# Altium PCB 11温度传感器OK.PcbDoc
Units mil, origin at the board's own origin, x right, y up, seen from the top; angles counter-clockwise.
Board outline 1673 x 1443 mil, 2 copper layers (Top Layer, Bottom Layer); 1 components, 5 nets, 8 pads, 18 vias.
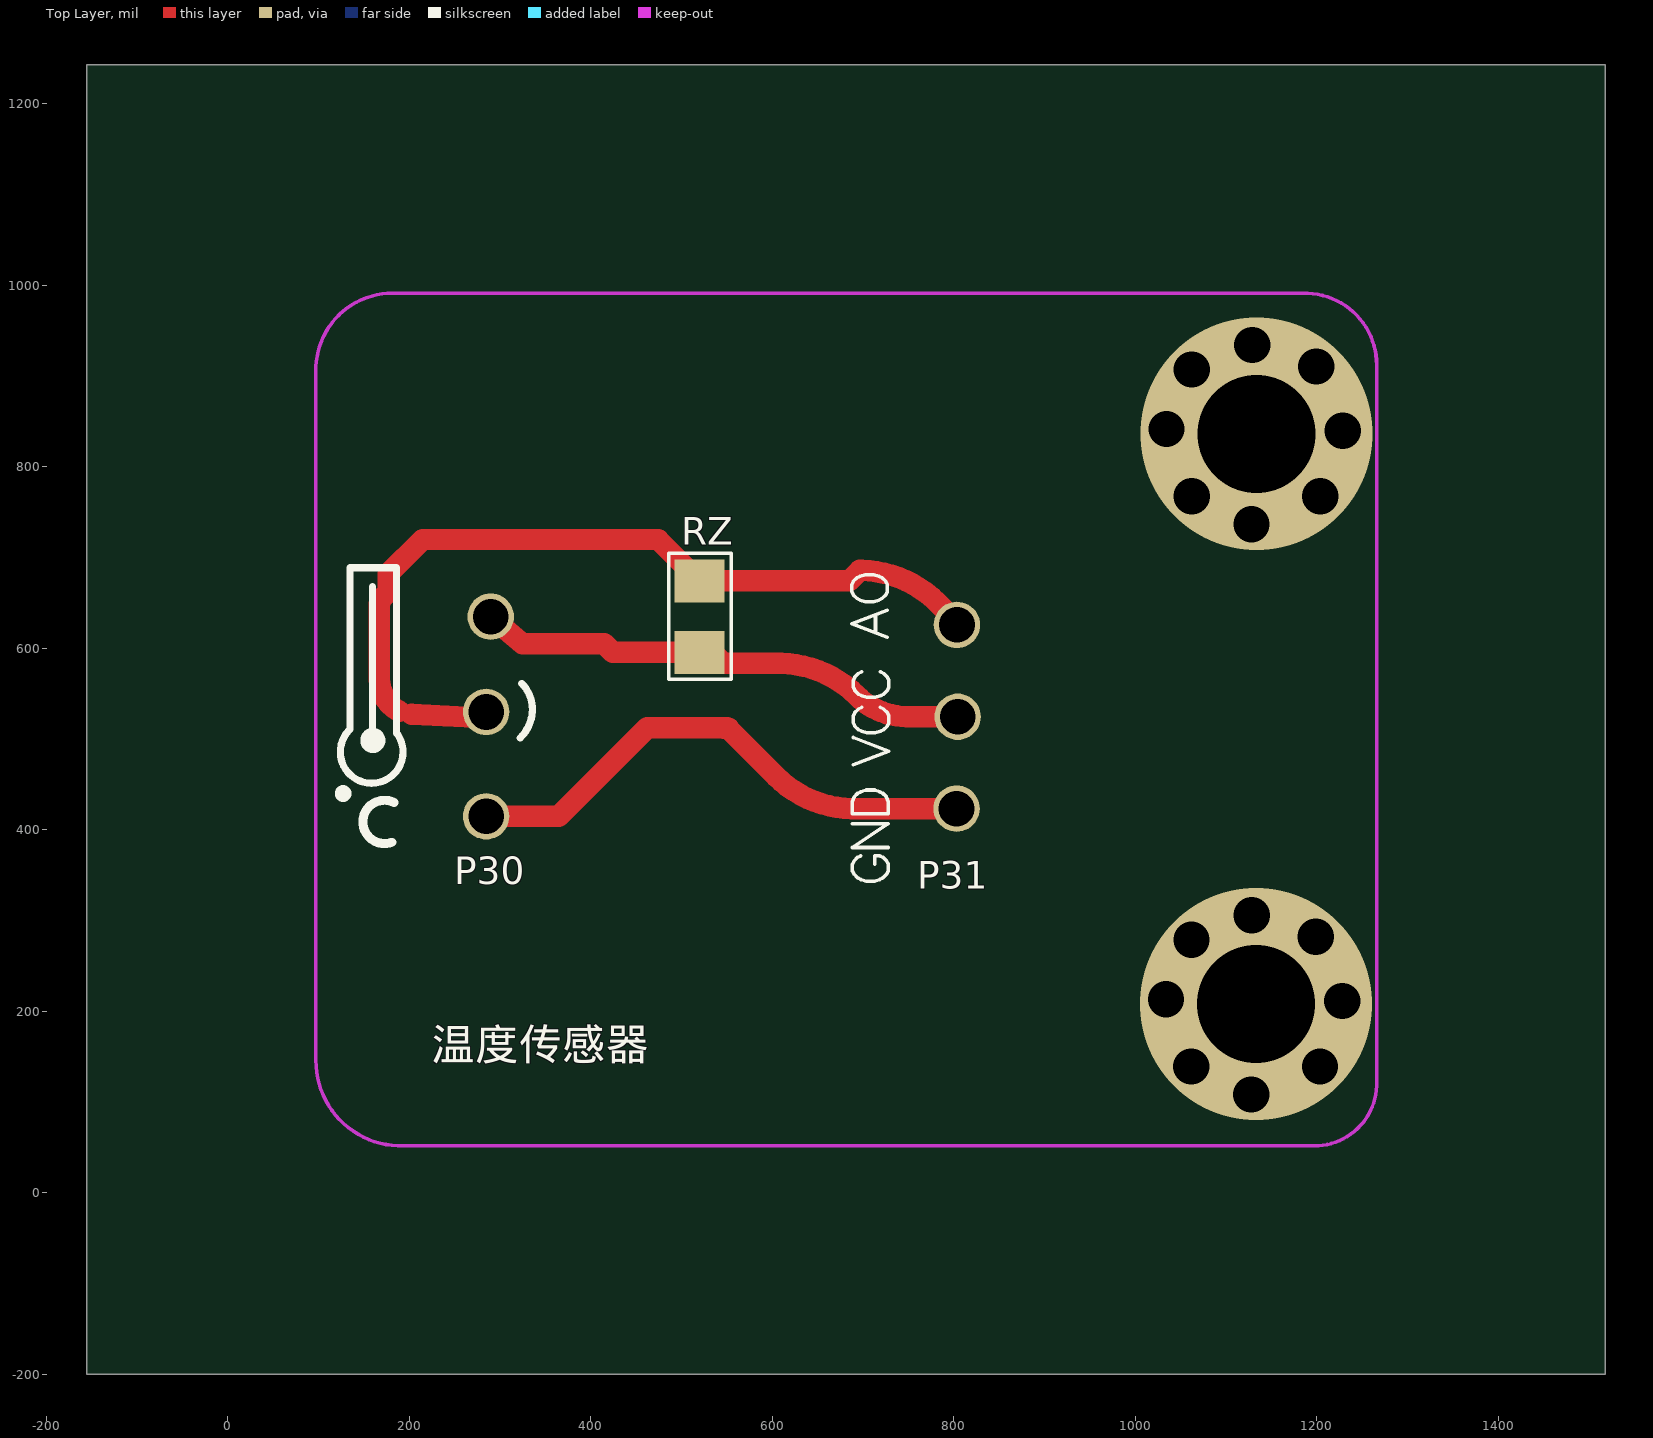
[diagram p0: Top Layer view]
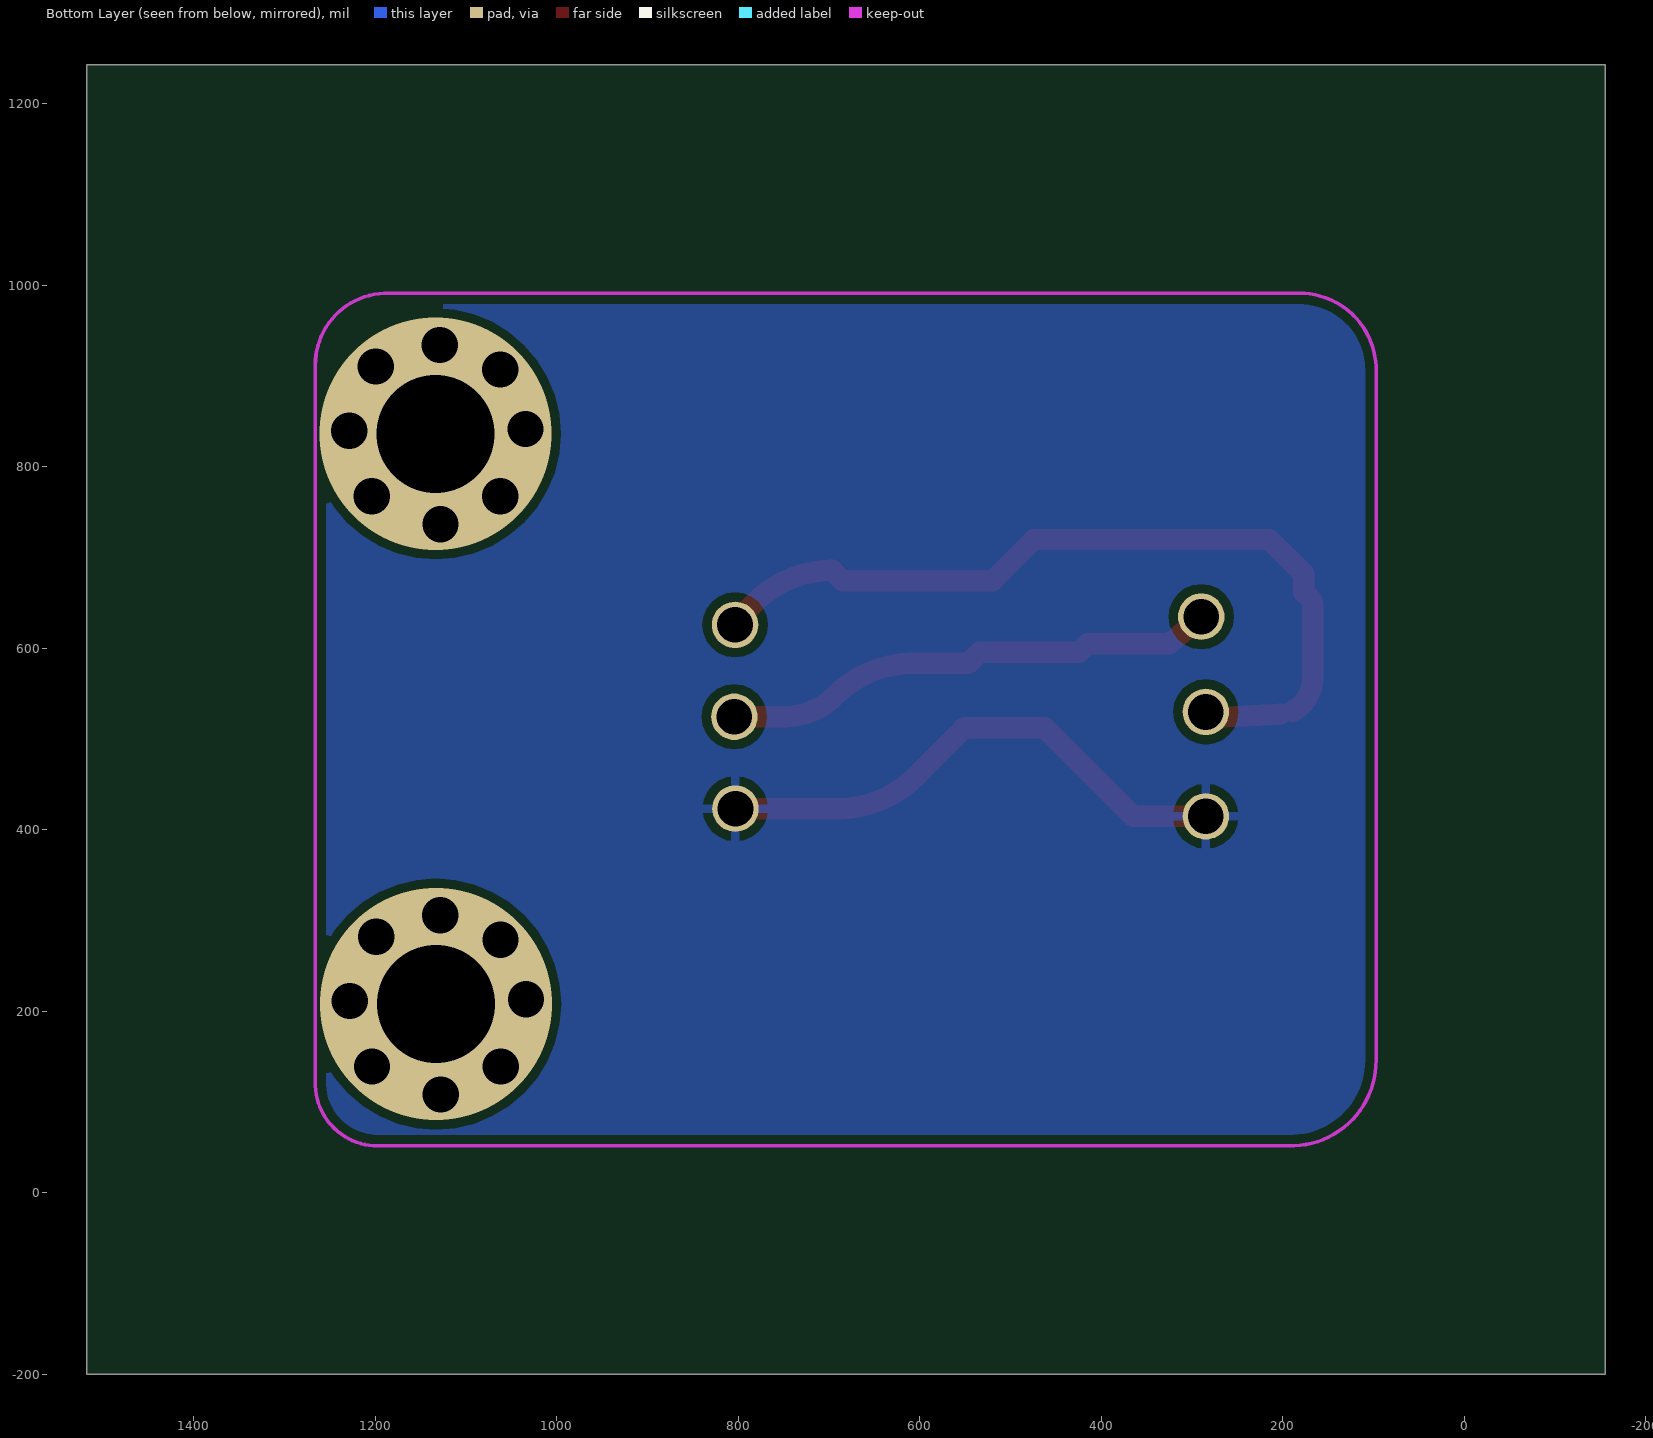
[diagram p1: Bottom Layer view, seen from below]

## Layer stack, top to bottom
Top Solder: solder mask 0.4, Solder Resist, Dk 3.5
Top Layer: signal copper 1.4
Dielectric1: dielectric 12.6, FR-4, Dk 4.8
Bottom Layer: signal copper 1.4
Bottom Solder: solder mask 0.4, Solder Resist, Dk 3.5

## Board outline
-155,-200 1518,-200 1518,1243 -155,1243

## Design rules (kind name [scope] priority, off if disabled: settings)
Clearance CAM_Clearance_2 [OnLayer('Top Layer')] p1: gap=10 ignorepadtopadclearanceinfootprint=FALSE except(0: Arc-Hole Track-Hole SMDPad-Hole THPad-Hole Via-Hole Fill-Hole Poly-Hole Region-Hole Text-Hole)
Clearance CAM_Clearance_1 [OnLayer('Bottom Layer')] p2: gap=10 ignorepadtopadclearanceinfootprint=FALSE except(0: Arc-Hole Track-Hole SMDPad-Hole THPad-Hole Via-Hole Fill-Hole Poly-Hole Region-Hole Text-Hole)
Clearance [All] p3: gap=10 ignorepadtopadclearanceinfootprint=FALSE except(0: Arc-Hole Track-Hole SMDPad-Hole THPad-Hole Via-Hole Fill-Hole Poly-Hole Region-Hole Text-Hole)
PolygonConnect [All] p1: connectstyle=Relief reliefconductorwidth=10 reliefentries=4 polygonreliefangle="90 Angle" airgapwidth=10
RoutingVias [All] p1: holewidth=28 width=50 viastyle="Through Hole" minholewidth=28 minwidth=50 maxholewidth=28 maxwidth=50
SilkToSolderMaskClearance SilkscreenOverComponentPads [IsPad] p1: minsilkscreentomaskgap=10 clearancetoexposedcopper=TRUE
SolderMaskExpansion [All] p1: expansion=4
Width CAM_Width_2 [OnLayer('Top Layer')] p1: maxlimit=24.62 minlimit=22.62 preferedwidth=23.62
Width CAM_Width_1 [OnLayer('Bottom Layer')] p2: maxlimit=11 minlimit=4 preferedwidth=5
Width [All] p3: maxlimit=10 minlimit=10 preferedwidth=10
29 further rules are at their usual default settings.

## Components (designator, comment, footprint, x,y, rotation, side; value= is the part's Value field where it differs from the comment)
RZ "10K 5%" 0805-R 520,635 r270 top

## Footprints (in the part's own frame and the unit in brackets; to place one, negate y for a bottom-side part, rotate by r counter-clockwise, add the part's x,y. Pads: shape width x height; smd on the part's side, far side on the other; paste and mask are expansions set on the pad)
0805-R [mm]
  rect 1.2x1.4 smd: 1(-1,0) 2(1,0)
  silkscreen extent -1.78,-0.86 1.75,0.89, body extent -0.97,-0.61 1.03,0.64, height 0.55

## Free pads (board coordinates)
  round 51.18 hole 39.37: 15(285,415) 15(285,530) 15(290,635) 15(803.36,423.44) 15(803.78,625.94) 15(804.61,524.69)

## Via types
v1: diameter 40, hole 40, Top Layer to Bottom Layer, 16 vias
v2: diameter 255.91, hole 129.92, Top Layer to Bottom Layer, 2 vias

## Nets (pads, with @x,y where several pads share a name; then routed paths per layer and width w, separated by ;. In a path a pad name is that pad's centre, name@x,y a point inside that pad or via, vN(x,y) a via of type N, cw(c..) or ccw(c..) an arc to the next point about the centre after c; other vN are vias at no path point)
$Net0: pad.15@285,415 pad.15@803.36,423.44 | length 596.3
  Top Layer w23.62: pad.15@285,415 365,415 462.6,512.6 550.86,512.6 604.67,458.79 610.83,453.04 617.38,447.74 624.28,442.91 631.5,438.57 639.01,434.75 646.76,431.45 654.73,428.71 662.87,426.53 671.14,424.92 679.5,423.9 687.91,423.46 690.03,423.44 pad.15@803.36,423.44 ; 546.69,512.19 552.52,512.19
$Net1: pad.15@285,530 pad.15@803.78,625.94 RZ.1 | length 934.1
  Top Layer w23.62: 189.32,530.8 187.2,531.88 185.16,533.11 183.2,534.48 181.35,535.97 179.61,537.6 179.09,538.13 177.1,540.35 175.26,542.69 173.6,545.16 172.11,547.74 170.8,550.42 169.68,553.18 168.76,556.02 168.04,558.91 167.53,561.84 167.21,564.8 167.11,567.78 167.11,647.49 167.12,647.69 167.16,648.48 167.26,649.26 167.41,650.04 167.61,650.81 167.87,651.55 168.18,652.28 168.54,652.99 168.95,653.67 169.4,654.32 169.9,654.93 170.44,655.51 171.73,656.78 177.12,661.64 177.12,682.12 215,720 474.37,720 RZ.1 685.12,674.37 696.69,685.94 698.81,685.91 707.22,685.47 715.58,684.45 723.85,682.84 731.99,680.66 739.96,677.92 747.71,674.62 755.22,670.8 762.44,666.46 769.34,661.63 775.89,656.33 782.05,650.58 802.97,629.66 803.05,629.58 803.38,629.22 803.69,628.83 803.96,628.42 804.21,628 804.42,627.55 804.61,627.1 804.76,626.63 804.86,626.21 804.88,626.15 804.96,625.67 805.01,625.18 pad.15@805.03,624.69 ; 203.15,527.61 pad.15@284.65,523.34
$Net2: pad.15@290,635 pad.15@804.61,524.69 RZ.2 | length 552.3
  Top Layer w23.62: pad.15@290,635 325,605 415,605 424.37,595.63 RZ.2 534.29,595.63 RZ.2@546.26,583.66 ; RZ.2@546.28,583.43 607.95,583.43 610.06,583.41 618.47,582.97 626.83,581.95 635.1,580.34 643.24,578.16 651.21,575.42 658.96,572.12 666.47,568.3 673.69,563.96 680.59,559.13 687.14,553.83 693.3,548.08 697.38,544.28 701.71,540.77 706.27,537.58 711.05,534.7 716.02,532.17 721.15,530 726.42,528.18 731.8,526.74 737.27,525.68 742.8,525 748.37,524.71 749.76,524.69 804.61,524.69 pad.15@806.64,524.69
$Net3: 
  other v1: 1127.97,108.48 1062.12,139.3 1203.79,139.3 1228.38,211.4 1034.22,213.48 1062.13,278.9 1199.22,282.23 1128.79,305.99
  other v2: 1133.38,208.06
$Net4: 
  other v1: 1128.35,736.86 1062.5,767.69 1204.17,767.69 1228.76,839.78 1034.6,841.87 1062.51,907.28 1199.59,910.62 1129.17,934.37
  other v2: 1133.75,836.44

## Polygon pours and split planes (outlines as drawn)
$Net0 on Bottom Layer "Top Layer-No Net 4" (solid, remove dead copper, pour order 1000): 10,1025 10,85 95,0 100,-5 1100,-5 1245,-5 1330,80 1345,95 1345,480 1345,975 1295,1025

## Keep-outs
Keep-Out Layer:
  lines w3.94: 97.34,145.64 97.34,907.06 ; 97.34,145.96 97.55,139.41 98.21,132.9 99.33,126.45 100.89,120.09 102.89,113.85 105.33,107.77 108.18,101.88 111.43,96.2 115.08,90.75 119.09,85.58 123.46,80.7 128.15,76.14 133.15,71.91 138.44,68.04 143.98,64.55 149.75,61.46 155.73,58.78 161.87,56.52 168.16,54.69 174.56,53.31 181.04,52.38 187.58,51.9 190.84,51.83 ; 97.34,907.34 97.4,910.28 97.83,916.15 98.67,921.98 99.91,927.74 101.55,933.39 103.59,938.91 106,944.28 108.78,949.47 111.92,954.45 115.39,959.21 119.19,963.7 123.29,967.92 127.68,971.85 132.33,975.46 137.22,978.73 142.33,981.66 147.63,984.22 153.1,986.41 158.7,988.21 164.42,989.62 170.22,990.62 176.08,991.21 181.96,991.4 ; 181.68,991.37 1187.54,991.37 ; 191.16,51.83 1197.7,51.83 ; 1187.8,991.29 1190.55,991.23 1196.03,990.83 1201.47,990.05 1206.85,988.89 1212.13,987.35 1217.29,985.46 1222.3,983.21 1227.15,980.61 1231.8,977.68 1236.23,974.43 1240.43,970.89 1244.38,967.05 1248.04,962.96 1251.41,958.61 1254.47,954.05 1257.2,949.28 1259.6,944.33 1261.64,939.22 1263.32,933.99 1264.63,928.65 1265.57,923.23 1266.13,917.76 1266.3,912.27 ; 1197.47,51.82 1202.26,51.97 1207.02,52.46 1211.74,53.27 1216.38,54.41 1220.94,55.88 1225.39,57.66 1229.7,59.74 1233.85,62.12 1237.83,64.78 1241.61,67.72 1245.18,70.91 1248.52,74.34 1251.61,78 1254.43,81.86 1256.99,85.92 1259.25,90.14 1261.21,94.5 1262.86,99 1264.2,103.59 1265.21,108.27 1265.89,113.01 1266.24,117.79 1266.3,120.19 ; 1266.3,120.42 1266.3,912.54

## Silkscreen, mask and mechanical layers (free items; w line width, h text height)
Top Overlay:
  drawing of 425 lines, arcs and shapes, not listed
  text "P30" at 250,340 h30
  text "P31" at 760,335 h30
  text "温度传感器" at 225,135 h60